# EAGLE board bottomtesting v44 (EAGLE 9.7.0), part 1 of 2
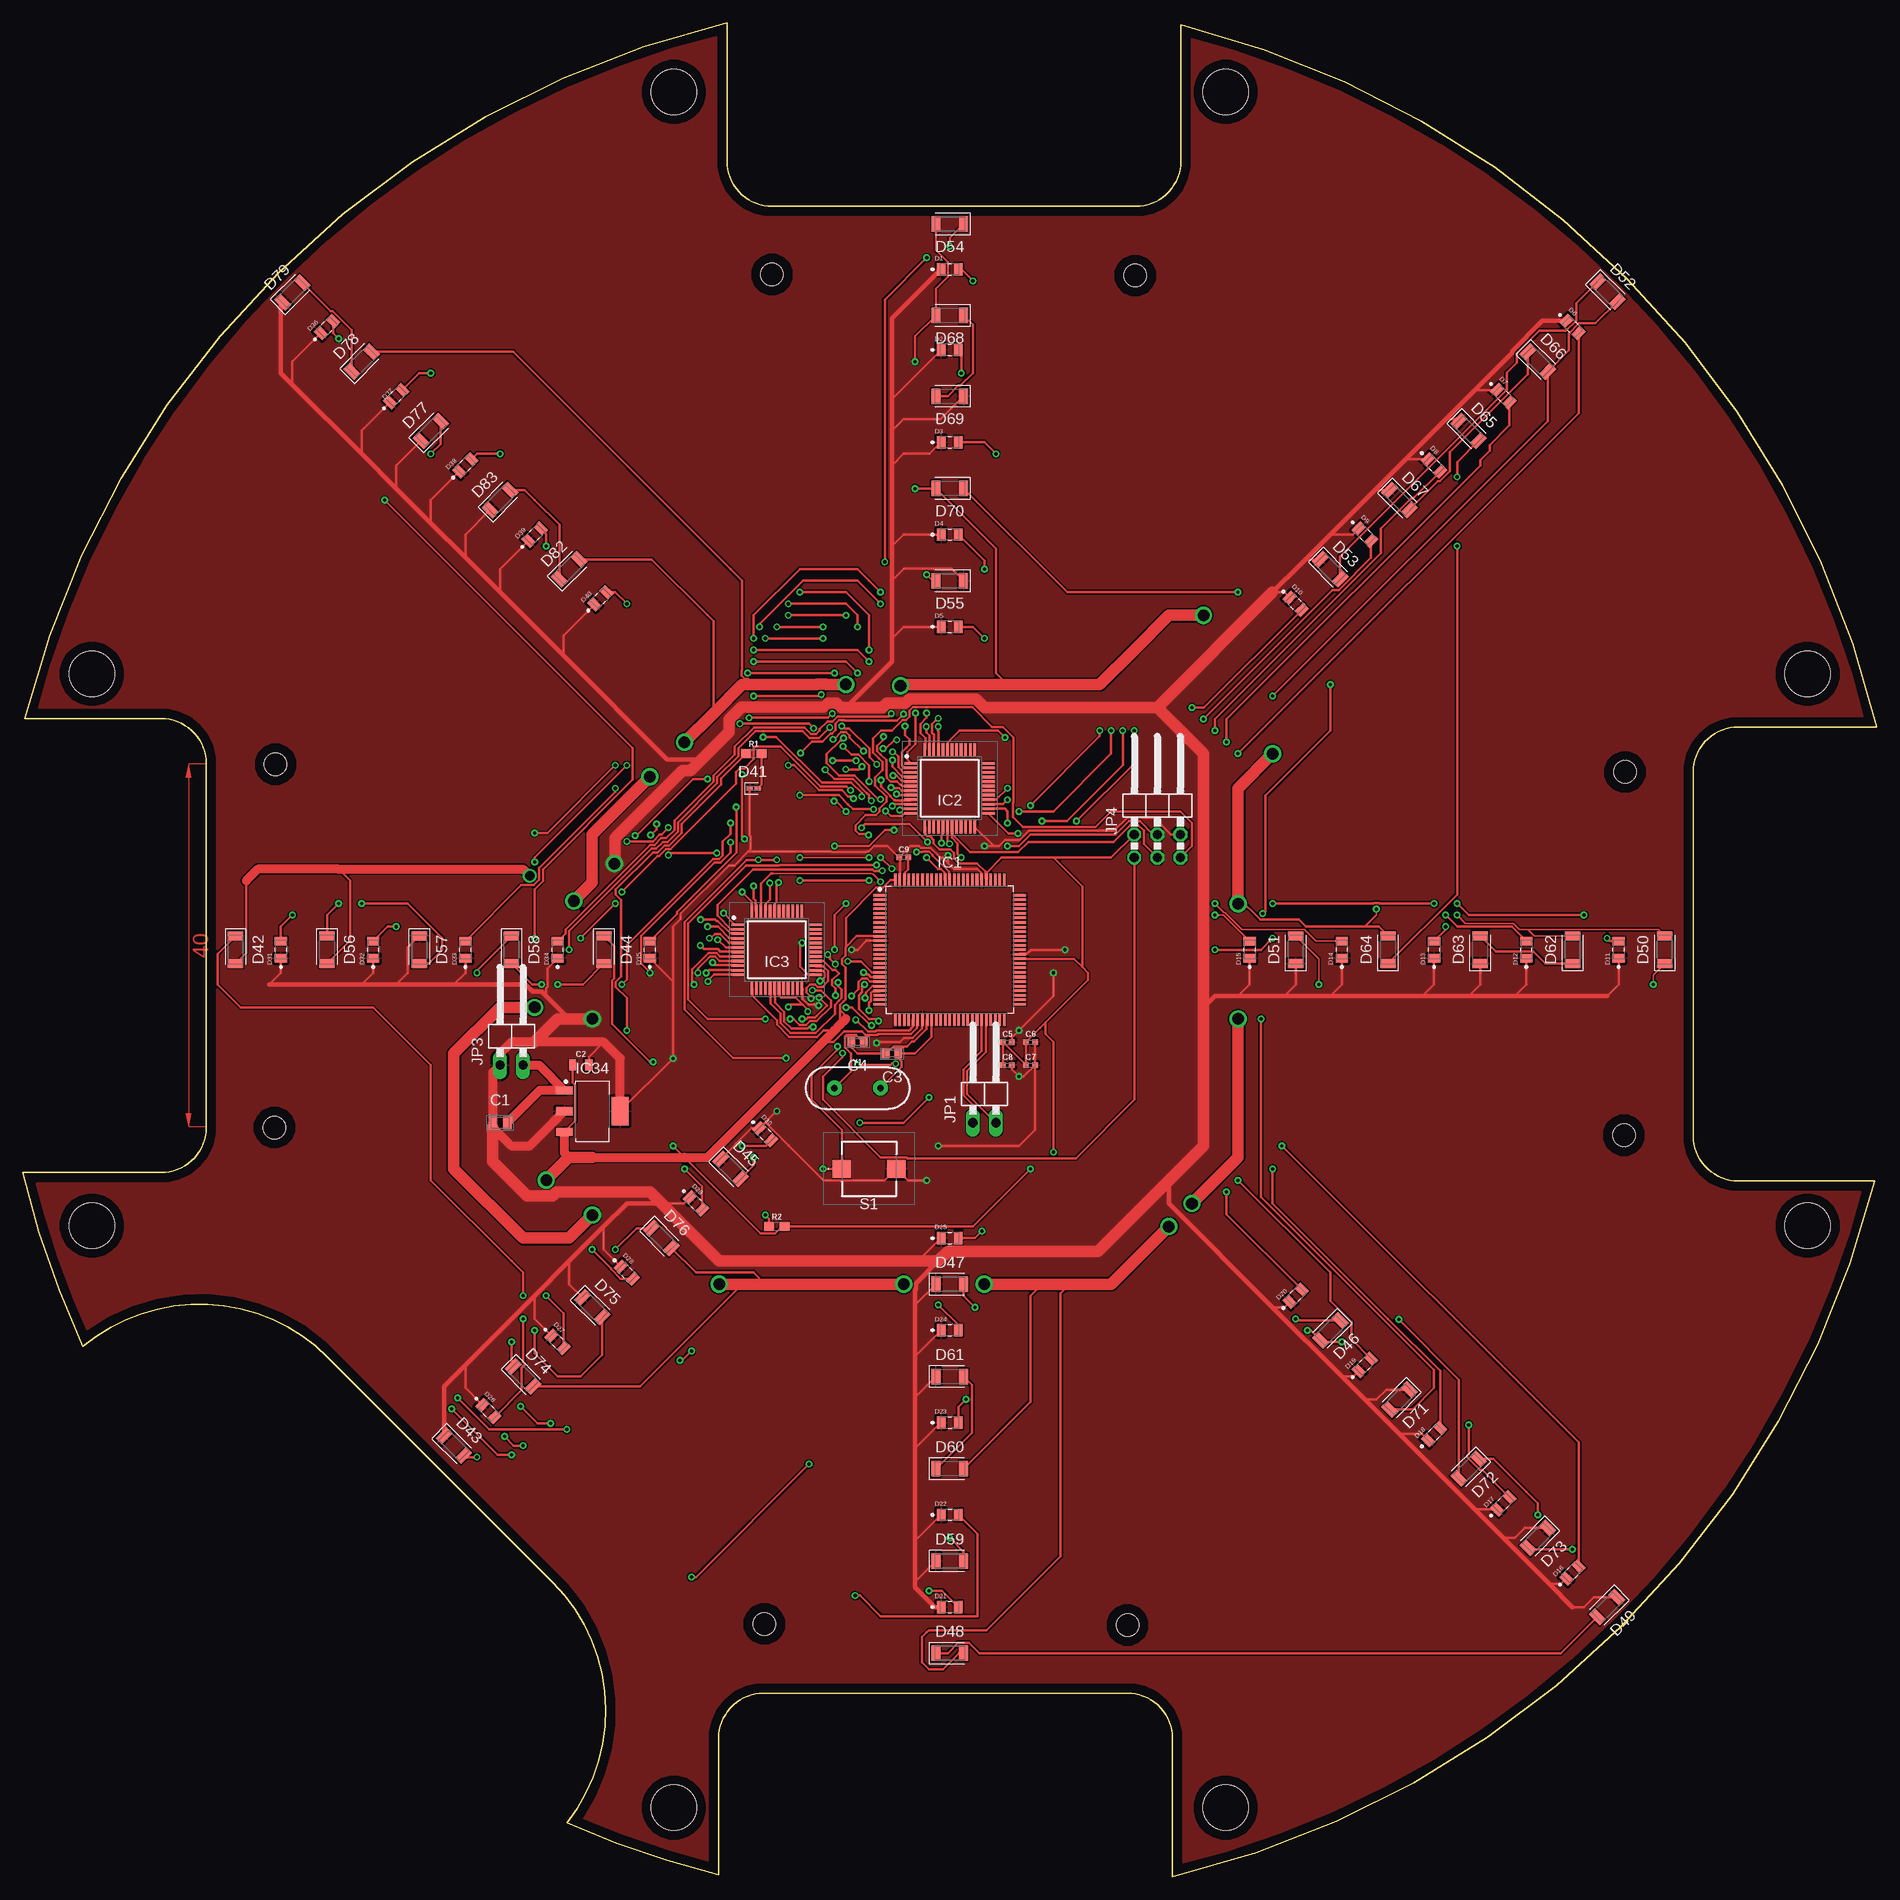
[diagram p0: board, top side]
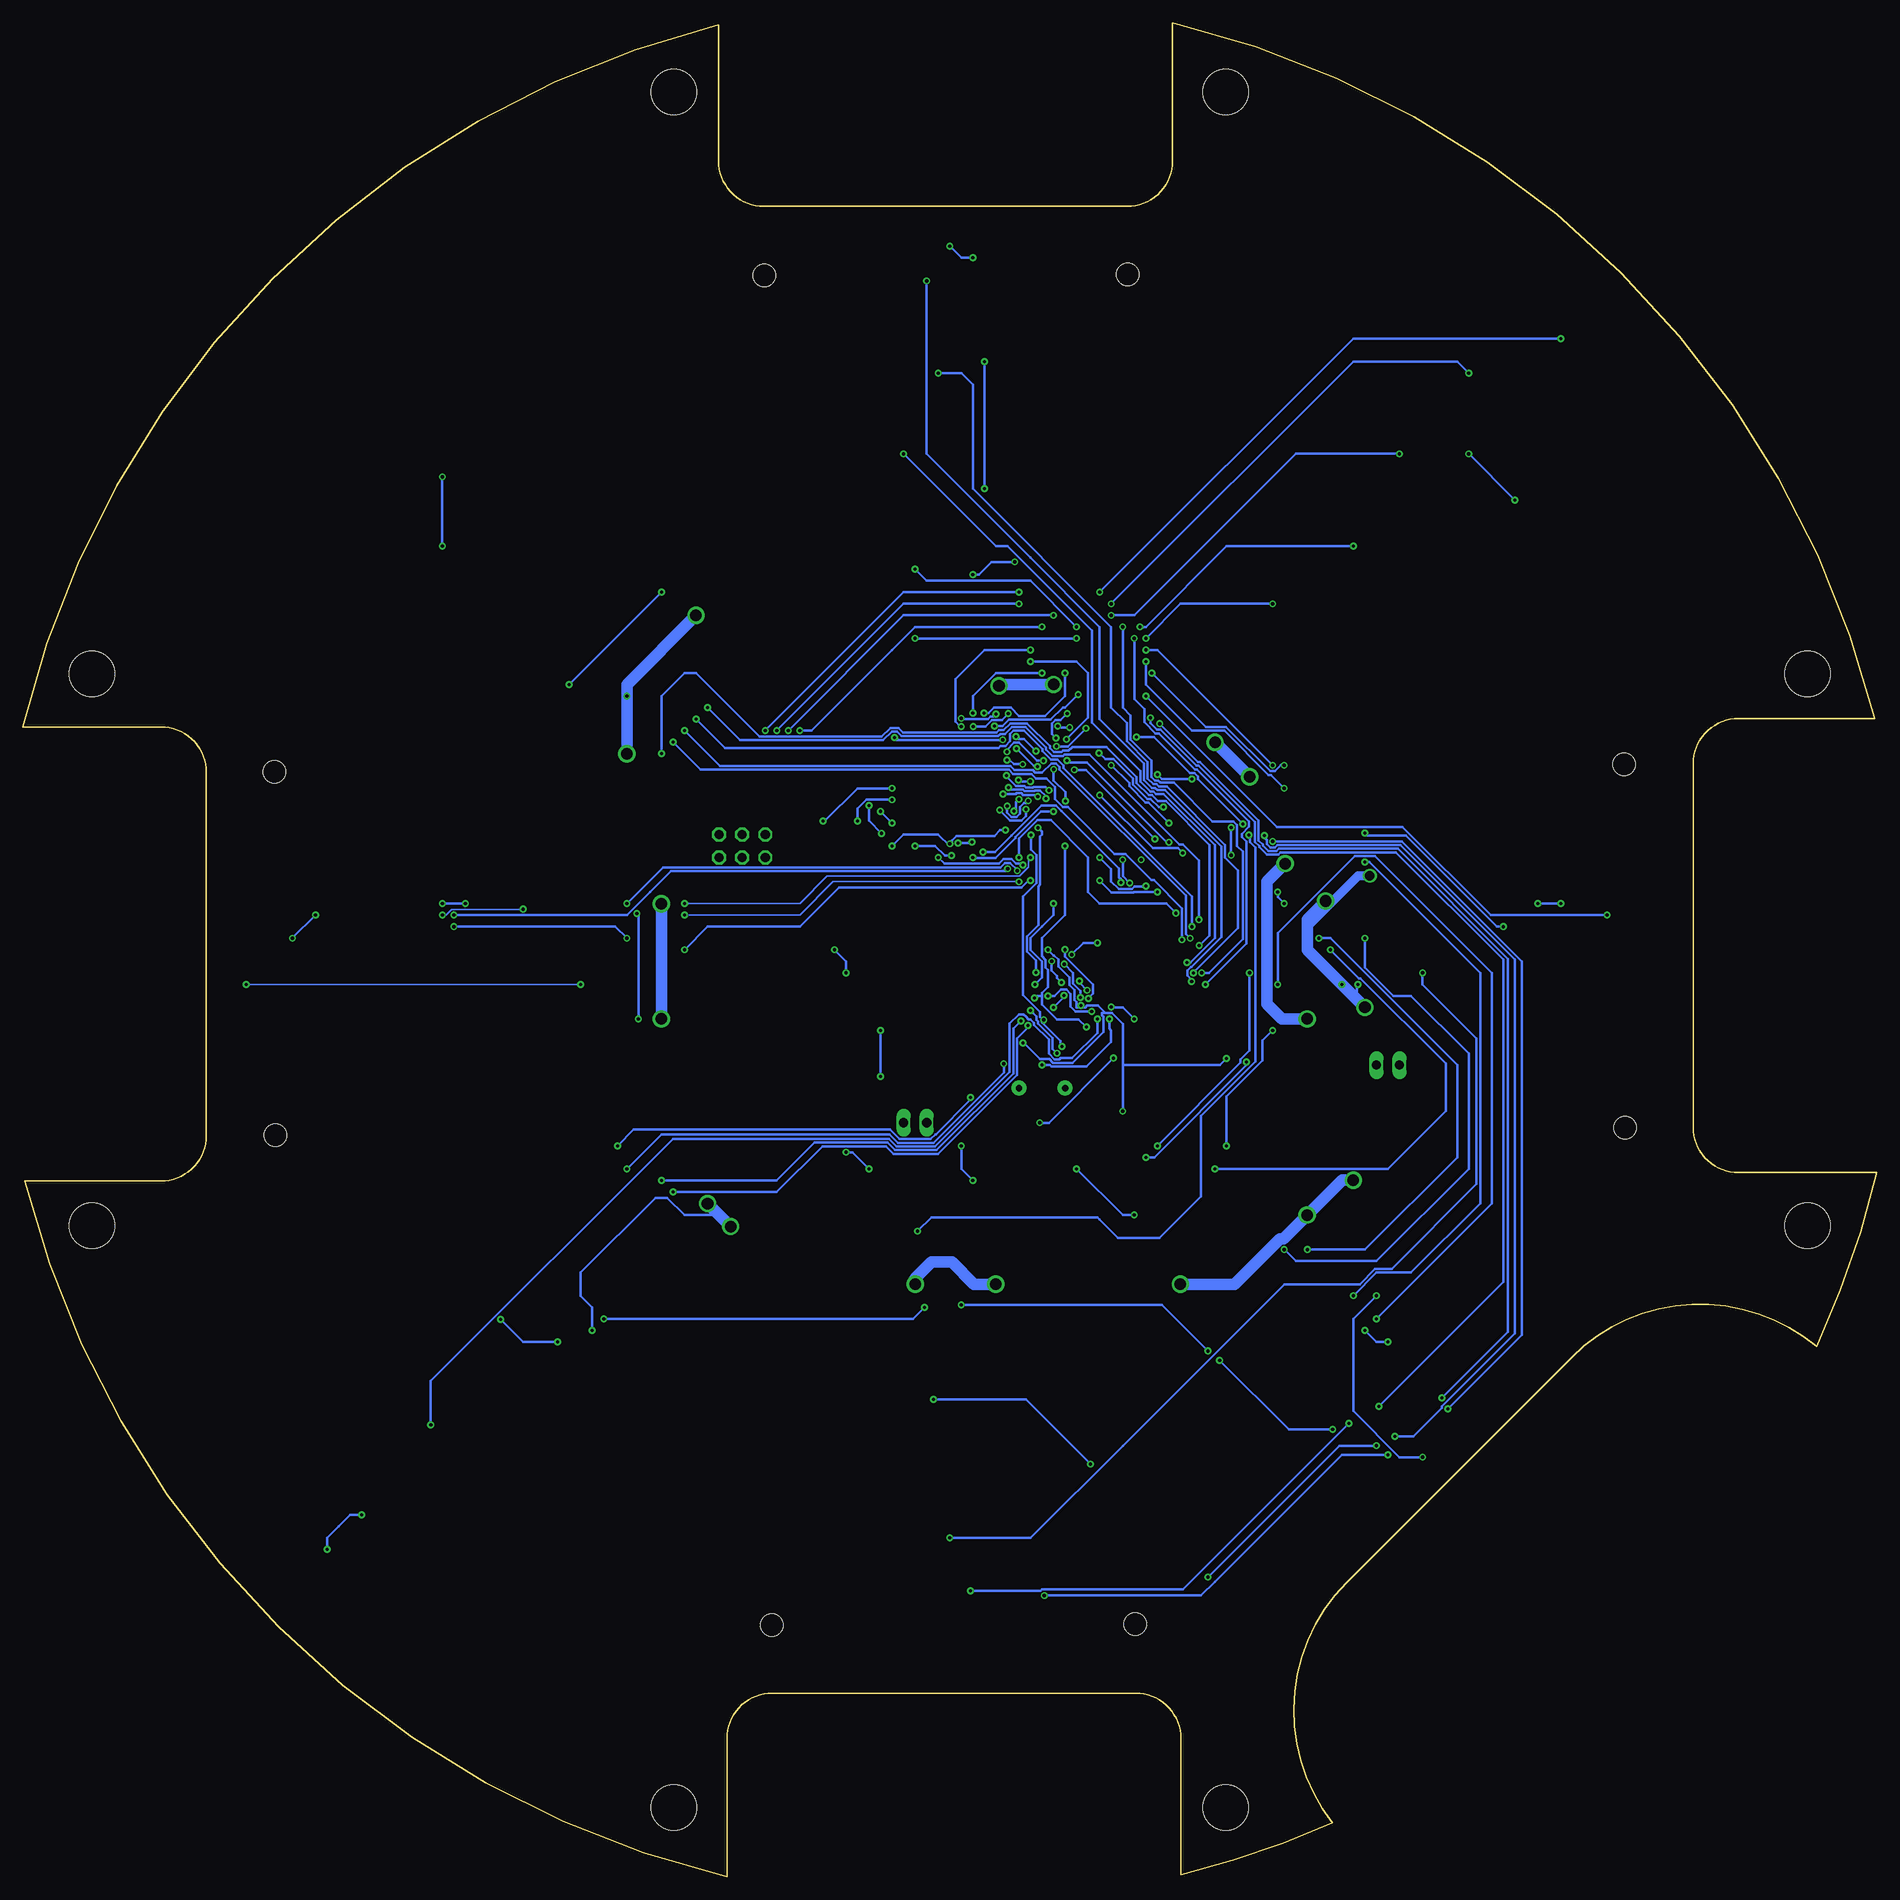
[diagram p1: board, bottom side, seen from below]

Size 204.19 x 204.19 mm. Coordinates in mm from the lower left corner, seen from the top.
Outline: 76.63,0.23 76.63,15.23 arc-90 81.63,20.23 121.63,20.23 arc-90 126.63,15.23 126.63,0 arc62 203.96,76.63 188.96,76.63 arc-90 183.96,81.63 183.96,121.63 arc-90 188.96,126.63 204.19,126.63 arc62 127.56,203.96 127.56,188.96 arc-90 122.56,183.96 82.56,183.96 arc-90 77.56,188.96 77.56,204.19 arc62 0.23,127.56 15.23,127.56 arc-90 20.23,122.56 20.23,82.56 arc-90 15.23,77.56 0,77.56 arc11 6.62,58.39 arc-85 33.61,57.2 58.36,32.45 arc-83 59.93,5.93 arc10 76.63,0.23
Copper layers (1*16): Top / Bottom
Stack-up Default Layer Stack: Top User Defined 0.035mm / Dielectric-1 User Defined 1.5mm / Bottom User Defined 0.035mm
Design rules: minimum copper width 6mil, minimum drill size 0.35mm, copper clearance wire_polygon to wire_polygon 6mil, copper clearance wire_polygon to pad_smd 6mil, copper clearance wire_polygon to via 6mil, copper clearance pad_smd to pad_smd 6mil, copper clearance pad_smd to via 6mil, copper clearance via to via 6mil, copper clearance smd to pad (same net) 6mil, copper clearance smd to via (same net) 6mil, copper clearance smd to smd (same net) 6mil, dimension clearance 40mil, restrict clearance 0mil, drill distance 6mil, keepout clearance 0mil
Holes 2.5 mm at 176.35,81.67 27.73,82.52 122.51,176.35 121.67,27.73 176.46,121.67 27.84,122.51 82.52,176.46 81.67,27.84
Holes 5 mm at 7.61,71.71 71.71,7.61 7.61,132.47 71.71,196.57 196.57,71.71 132.47,7.61 196.57,132.47 132.47,196.57

## Footprints (pad centres in the part's own frame; a part is rotated, then mirrored left to right if it is on the bottom)
CAPC2012X135N = smd 0.95 x 1.39: 1 -0.8,0; 2 0.8,0
0805 = smd 0.8 x 1.2: 1 -0.9,0; 2 0.9,0
CAPC1608X94N = smd 0.83 x 0.96: 1 -0.68,0; 2 0.68,0
0402-TIGHT = smd 0.6 x 0.6: 1 -0.5,0; 2 0.5,0
DIOC2012X80N = smd 0.91 x 1.36: A 0.95,0; K -0.95,0
LEDC1005X25N_FLAT-G = smd 0.7 x 0.5: A 0.45,0; C -0.45,0
LEDC3216X110N_R = smd 0.962 x 1.712: 1 -1.525,0; 2 1.525,0
QFP50P1600X1600X160-100N = smd 1.469 x 0.28: 1 -7.671,6; 2 -7.671,5.5; 3 -7.671,5; 4 -7.671,4.5; 5 -7.671,4; 6 -7.671,3.5; 7 -7.671,3; 8 -7.671,2.5; 9 -7.671,2; 10 -7.671,1.5; 11 -7.671,1; 12 -7.671,0.5; 13 -7.671,0; 14 -7.671,-0.5; 15 -7.671,-1; 16 -7.671,-1.5; 17 -7.671,-2; 18 -7.671,-2.5; 19 -7.671,-3; 20 -7.671,-3.5; 21 -7.671,-4; 22 -7.671,-4.5; 23 -7.671,-5; 24 -7.671,-5.5; 25 -7.671,-6; 51 7.671,-6; 52 7.671,-5.5; 53 7.671,-5; 54 7.671,-4.5; 55 7.671,-4; 56 7.671,-3.5; 57 7.671,-3; 58 7.671,-2.5; 59 7.671,-2; 60 7.671,-1.5; 61 7.671,-1; 62 7.671,-0.5; 63 7.671,0; 64 7.671,0.5; 65 7.671,1; 66 7.671,1.5; 67 7.671,2; 68 7.671,2.5; 69 7.671,3; 70 7.671,3.5; 71 7.671,4; 72 7.671,4.5; 73 7.671,5; 74 7.671,5.5; 75 7.671,6 | smd 0.28 x 1.469: 26 -6,-7.671; 27 -5.5,-7.671; 28 -5,-7.671; 29 -4.5,-7.671; 30 -4,-7.671; 31 -3.5,-7.671; 32 -3,-7.671; 33 -2.5,-7.671; 34 -2,-7.671; 35 -1.5,-7.671; 36 -1,-7.671; 37 -0.5,-7.671; 38 0,-7.671; 39 0.5,-7.671; 40 1,-7.671; 41 1.5,-7.671; 42 2,-7.671; 43 2.5,-7.671; 44 3,-7.671; 45 3.5,-7.671; 46 4,-7.671; 47 4.5,-7.671; 48 5,-7.671; 49 5.5,-7.671; 50 6,-7.671; 76 6,7.671; 77 5.5,7.671; 78 5,7.671; 79 4.5,7.671; 80 4,7.671; 81 3.5,7.671; 82 3,7.671; 83 2.5,7.671; 84 2,7.671; 85 1.5,7.671; 86 1,7.671; 87 0.5,7.671; 88 0,7.671; 89 -0.5,7.671; 90 -1,7.671; 91 -1.5,7.671; 92 -2,7.671; 93 -2.5,7.671; 94 -3,7.671; 95 -3.5,7.671; 96 -4,7.671; 97 -4.5,7.671; 98 -5,7.671; 99 -5.5,7.671; 100 -6,7.671
QFP50P900X900X120-48N = smd 1.475 x 0.3: 1 -4.238,2.75; 2 -4.238,2.25; 3 -4.238,1.75; 4 -4.238,1.25; 5 -4.238,0.75; 6 -4.238,0.25; 7 -4.238,-0.25; 8 -4.238,-0.75; 9 -4.238,-1.25; 10 -4.238,-1.75; 11 -4.238,-2.25; 12 -4.238,-2.75; 25 4.238,-2.75; 26 4.238,-2.25; 27 4.238,-1.75; 28 4.238,-1.25; 29 4.238,-0.75; 30 4.238,-0.25; 31 4.238,0.25; 32 4.238,0.75; 33 4.238,1.25; 34 4.238,1.75; 35 4.238,2.25; 36 4.238,2.75 | smd 0.3 x 1.475: 13 -2.75,-4.238; 14 -2.25,-4.238; 15 -1.75,-4.238; 16 -1.25,-4.238; 17 -0.75,-4.238; 18 -0.25,-4.238; 19 0.25,-4.238; 20 0.75,-4.238; 21 1.25,-4.238; 22 1.75,-4.238; 23 2.25,-4.238; 24 2.75,-4.238; 37 2.75,4.238; 38 2.25,4.238; 39 1.75,4.238; 40 1.25,4.238; 41 0.75,4.238; 42 0.25,4.238; 43 -0.25,4.238; 44 -0.75,4.238; 45 -1.25,4.238; 46 -1.75,4.238; 47 -2.25,4.238; 48 -2.75,4.238
SOT230P700X170-4 = smd 1.86 x 0.898: 1 -3.075,2.3; 2 -3.075,0; 3 -3.075,-2.3 | smd 1.86 x 3.189: 4 3.075,0
1X02/90 = drill 1.016 long: 1 -1.27,-3.81; 2 1.27,-3.81
2X03/90 = drill 1.016 octagon: 1 -2.54,-6.35; 2 -2.54,-3.81; 3 0,-6.35; 4 0,-3.81; 5 2.54,-6.35; 6 2.54,-3.81
0603 = smd 1.1 x 1: 1 -0.85,0; 2 0.85,0
EVPBDCC1A000 = smd 2 x 2: A1 -3,0; B1 3,0
HC49US = drill 0.7 pad 1.651: 1 -2.54,0; 2 2.54,0

## Placement (x,y rotation side)
C1  CM21X5R107M06AT  [CAPC2012X135N]  52.56,83.04 0 top
C2  10uF  [0805]  61.45,89.39 0 top
C3  VJ0603D220FXPAJ  [CAPC1608X94N]  95.74,90.66 0 top
C4  VJ0603D220FXPAJ  [CAPC1608X94N]  91.93,91.93 0 top
C5  0.1uF  [0402-TIGHT]  108.44,91.93 0 top
C6  0.1uF  [0402-TIGHT]  110.98,91.93 0 top
C7  0.1uF  [0402-TIGHT]  110.98,89.39 0 top
C8  0.1uF  [0402-TIGHT]  108.44,89.39 0 top
C9  0.1uF  [0402-TIGHT]  97.01,112.25 0 top
D1  019-141-411-R  [DIOC2012X80N]  102.09,177.02 0 top
D2  019-141-411-R  [DIOC2012X80N]  102.09,168.13 0 top
D3  019-141-411-R  [DIOC2012X80N]  102.09,157.97 0 top
D4  019-141-411-R  [DIOC2012X80N]  102.09,147.81 0 top
D5  019-141-411-R  [DIOC2012X80N]  102.09,137.65 0 top
D6  019-141-411-R  [DIOC2012X80N]  170.67,170.67 315 top
D7  019-141-411-R  [DIOC2012X80N]  163.05,163.05 315 top
D8  019-141-411-R  [DIOC2012X80N]  155.43,155.43 315 top
D9  019-141-411-R  [DIOC2012X80N]  147.81,147.81 315 top
D10  019-141-411-R  [DIOC2012X80N]  140.19,140.19 315 top
D11  019-141-411-R  [DIOC2012X80N]  175.75,102.09 90 top
D12  019-141-411-R  [DIOC2012X80N]  165.59,102.09 90 top
D13  019-141-411-R  [DIOC2012X80N]  155.43,102.09 90 top
D14  019-141-411-R  [DIOC2012X80N]  145.27,102.09 90 top
D15  019-141-411-R  [DIOC2012X80N]  135.11,102.09 90 top
D16  019-141-411-R  [DIOC2012X80N]  170.67,33.51 45 top
D17  019-141-411-R  [DIOC2012X80N]  163.05,41.13 45 top
D18  019-141-411-R  [DIOC2012X80N]  155.43,48.75 45 top
D19  019-141-411-R  [DIOC2012X80N]  147.81,56.37 45 top
D20  019-141-411-R  [DIOC2012X80N]  140.19,63.99 45 top
D21  019-141-411-R  [DIOC2012X80N]  102.09,29.7 0 top
D22  019-141-411-R  [DIOC2012X80N]  102.09,39.86 0 top
D23  019-141-411-R  [DIOC2012X80N]  102.09,50.02 0 top
D24  019-141-411-R  [DIOC2012X80N]  102.09,60.18 0 top
D25  019-141-411-R  [DIOC2012X80N]  102.09,70.34 0 top
D26  019-141-411-R  [DIOC2012X80N]  51.29,51.29 315 top
D27  019-141-411-R  [DIOC2012X80N]  58.91,58.91 315 top
D28  019-141-411-R  [DIOC2012X80N]  66.53,66.53 315 top
D29  019-141-411-R  [DIOC2012X80N]  74.15,74.15 315 top
D30  019-141-411-R  [DIOC2012X80N]  81.77,81.77 315 top
D31  019-141-411-R  [DIOC2012X80N]  28.43,102.09 90 top
D32  019-141-411-R  [DIOC2012X80N]  38.59,102.09 90 top
D33  019-141-411-R  [DIOC2012X80N]  48.75,102.09 90 top
D34  019-141-411-R  [DIOC2012X80N]  58.91,102.09 90 top
D35  019-141-411-R  [DIOC2012X80N]  69.07,102.09 90 top
D36  019-141-411-R  [DIOC2012X80N]  33.51,170.67 45 top
D37  019-141-411-R  [DIOC2012X80N]  41.13,163.05 45 top
D38  019-141-411-R  [DIOC2012X80N]  48.75,155.43 45 top
D39  019-141-411-R  [DIOC2012X80N]  56.37,147.81 45 top
D40  019-141-411-R  [DIOC2012X80N]  63.63,140.79 45 top
D41  LED_GREEN  [LEDC1005X25N_FLAT-G]  80.5,119.87 0 top
D42  LED_RED  [LEDC3216X110N_R]  23.45,102.09 270 top
D43  LED_RED  [LEDC3216X110N_R]  47.48,47.48 315 top
D44  LED_RED  [LEDC3216X110N_R]  63.99,102.09 270 top
D45  LED_RED  [LEDC3216X110N_R]  77.96,77.96 315 top
D46  LED_RED  [LEDC3216X110N_R]  144,60.18 225 top
D47  LED_RED  [LEDC3216X110N_R]  102.09,65.26 0 top
D48  LED_RED  [LEDC3216X110N_R]  102.09,24.62 0 top
D49  LED_RED  [LEDC3216X110N_R]  174.48,29.7 225 top
D50  LED_RED  [LEDC3216X110N_R]  180.83,102.09 90 top
D51  LED_RED  [LEDC3216X110N_R]  140.19,102.09 90 top
D52  LED_RED  [LEDC3216X110N_R]  174.53,174.57 315 top
D53  LED_RED  [LEDC3216X110N_R]  144,144 315 top
D54  LED_RED  [LEDC3216X110N_R]  102.09,182.01 180 top
D55  LED_RED  [LEDC3216X110N_R]  102.09,142.73 180 top
D56  LED_RED  [LEDC3216X110N_R]  33.51,102.09 270 top
D57  LED_RED  [LEDC3216X110N_R]  43.67,102.09 270 top
D58  LED_RED  [LEDC3216X110N_R]  53.83,102.09 270 top
D59  LED_RED  [LEDC3216X110N_R]  102.09,34.78 0 top
D60  LED_RED  [LEDC3216X110N_R]  102.09,44.94 0 top
D61  LED_RED  [LEDC3216X110N_R]  102.09,55.1 0 top
D62  LED_RED  [LEDC3216X110N_R]  170.67,102.09 90 top
D63  LED_RED  [LEDC3216X110N_R]  160.51,102.09 90 top
D64  LED_RED  [LEDC3216X110N_R]  150.35,102.09 90 top
D65  LED_RED  [LEDC3216X110N_R]  159.24,159.24 315 top
D66  LED_RED  [LEDC3216X110N_R]  166.86,166.86 315 top
D67  LED_RED  [LEDC3216X110N_R]  151.62,151.62 315 top
D68  LED_RED  [LEDC3216X110N_R]  102.09,171.94 180 top
D69  LED_RED  [LEDC3216X110N_R]  102.09,163.05 180 top
D70  LED_RED  [LEDC3216X110N_R]  102.09,152.89 180 top
D71  LED_RED  [LEDC3216X110N_R]  151.62,52.56 225 top
D72  LED_RED  [LEDC3216X110N_R]  159.24,44.94 225 top
D73  LED_RED  [LEDC3216X110N_R]  166.86,37.32 225 top
D74  LED_RED  [LEDC3216X110N_R]  55.1,55.1 315 top
D75  LED_RED  [LEDC3216X110N_R]  62.72,62.72 315 top
D76  LED_RED  [LEDC3216X110N_R]  70.34,70.34 315 top
D77  LED_RED  [LEDC3216X110N_R]  44.94,159.24 45 top
D78  LED_RED  [LEDC3216X110N_R]  37.32,166.86 45 top
D79  LED_RED  [LEDC3216X110N_R]  29.7,174.48 45 top
D82  LED_RED  [LEDC3216X110N_R]  60.18,144 45 top
D83  LED_RED  [LEDC3216X110N_R]  52.56,151.62 45 top
IC1  ATMEGA2560  [QFP50P1600X1600X160-100N]  102.09,102.09 0 top
IC2  ADG731BSUZ  [QFP50P900X900X120-48N]  102.09,119.87 0 top
IC3  ADG731BSUZ  [QFP50P900X900X120-48N]  83.04,102.09 0 top
IC34  LM7805_SOT223  [SOT230P700X170-4]  62.72,84.31 0 top
JP1  PINHD-1X2/90  [1X02/90]  105.9,86.85 0 top
JP3  PINHD-1X2/90  [1X02/90]  53.83,93.2 0 top
JP4  PINHD-2X3/90  [2X03/90]  124.95,118.6 0 top
R1  1k  [0603]  80.5,123.68 0 top
R2  10k  [0603]  83.04,71.61 0 top
S1  EVP-BDCC1A000  [EVPBDCC1A000]  93.2,77.96 0 top
Y1  16MHz  [HC49US]  91.93,86.85 0 top

## Library data of the parts
C1 = CM21X5R107M06AT; DESCRIPTION: Multilayer Ceramic Capacitors MLCC - SMD/SMT 6.3V 100uF X5R 0805 20% 3Term; HEIGHT: 1.35mm; MANUFACTURER_NAME: KYOCERA; MANUFACTURER_PART_NUMBER: CM21X5R107M06AT; MOUSER_PART_NUMBER: 581-CM21X5R107M06AT; MOUSER_PRICE-STOCK: https://www.mouser.co.uk/ProductDetail/KYOCERA-AVX/CM21X5R107M06AT?qs=Znm5pLBrcAI44q2aWOSJYQ%3D%3D
C2 = SparkFun-Capacitors; PROD_ID: CAP-14259
C3 C4 = VJ0603D220FXPAJ; DESCRIPTION: Multilayer Ceramic Capacitors MLCC - SMD/SMT 0603 22pF 250V C0G 1% HI FREQ; HEIGHT: 0.94mm; MANUFACTURER_NAME: Vishay; MANUFACTURER_PART_NUMBER: VJ0603D220FXPAJ; MOUSER_PART_NUMBER: 77-VJ0603D220FXPAJ; MOUSER_PRICE-STOCK: https://www.mouser.co.uk/ProductDetail/Vishay-Vitramon/VJ0603D220FXPAJ?qs=iYZfuFMDqcb%2FcnkyiAmShQ%3D%3D
C5-C9 = SparkFun-Capacitors; PROD_ID: CAP-12416
D1-D40 = 019-141-411-R; MANUFACTURER: Advanced Photonix; MAXIMUM_PACKAGE_HEIGHT: 0.8mm; PARTREV: Rev 5/7/2019; STANDARD: IPC 7351B
D41 = LED; CATEGORY: LED; COLOR: GREEN; DESCRIPTION: CHIP LED FLAT; SUB-CATEGORY: CHIP; TYPE: FLAT_TOP
D42-D79 D82 D83 = Opto-Electronic; CATEGORY: Opto-Electronic; COLOR: Red; SUB-CATEGORY: LED
IC1 = IC_Embedded; CATEGORY: IC_Embedded; DESCRIPTION: IC MCU 8BIT 256KB FLASH 100TQFP; MANUFACTURER: Microchip Technology; MPN: ATMEGA2560-16AUR; OPERATING_TEMP: -40°C to 85°C; PART_STATUS: Active; SERIES: AVR® ATmega; SPEED: 16MHz; SUB-CATEGORY: Microcontroller
IC2 IC3 = ADG731BSUZ; DESCRIPTION: ADG731BSUZ, Multiplexer Single 32:1, 3, 5V, 48-Pin, TQFP; HEIGHT: 1.2mm; MANUFACTURER_NAME: Analog Devices; MANUFACTURER_PART_NUMBER: ADG731BSUZ; MOUSER_PART_NUMBER: 584-ADG731BSUZ; MOUSER_PRICE-STOCK: https://www.mouser.co.uk/ProductDetail/Analog-Devices/ADG731BSUZ?qs=BpaRKvA4VqEJueulxDCy6w%3D%3D
IC34 = IC_Power-Management; CATEGORY: IC_Logic; DESCRIPTION: 5V Voltage Regulator; MANUFACTURER: Generic; MPN: Generic; SERIES: LM7805; SUB-CATEGORY: Voltage Regulator; TYPE: 5V
JP1 JP3 = Connector; CATEGORY: CONNECTOR; SUB-CATEGORY: PIN-HEADER
JP4 = Connector; CATEGORY: Headers; DESCRIPTION: Header, Right Angle, 2x3 Position; MANUFACTURER: Generic; MPN: Generic; OPERATING_TEMPERATURE: Generic; PART_STATUS: Active; PITCH: 0.100" (2.54mm); ROHS_COMPLIANCE: Generic; SERIES: Generic; SUB-CATEGORY: Headers, Male Pins; TYPE: Board to Board or Cable, Unshrouded, Through Hole, Right Angle
R1 = SparkFun-Resistors; PROD_ID: RES-07856
R2 = SparkFun-Resistors; PROD_ID: RES-00824
S1 = EVP-BDCC1A000; DESCRIPTION: Tactile Switches 6mm x 6mm SMD Op Force 4.0N; HEIGHT: 4.2mm; MANUFACTURER_NAME: Panasonic; MANUFACTURER_PART_NUMBER: EVP-BDCC1A000; MOUSER_PART_NUMBER: 667-EVP-BDCC1A000; MOUSER_PRICE-STOCK: https://www.mouser.co.uk/ProductDetail/Panasonic/EVP-BDCC1A000?qs=4qgZ1GHix0Ui2FekNThUWQ%3D%3D
Y1 = SparkFun-Clocks; PROD_ID: XTAL-08181; SF_ID: COM-00536

## Nets
+5V: C2.1 C5.1 C6.1 C7.1 C8.1 D42.2 D44.2 D46.2 D48.2 D50.2 D52.2 D54.2 D56.2 D58.2 D60.2 D62.2 D64.2 D66.2 D68.2 D70.2 D72.2 D74.2 D76.2 D78.2 D82.2 IC1.10 IC1.31 IC1.61 IC1.80 IC1.100 IC2.13 IC3.13 IC34.3 JP4.2 R1.1 R2.2
AREF: C9.2 IC1.98
GND: C1.1 C2.2 C5.2 C6.2 C7.2 C8.2 C9.1 D1.K D2.K D3.K D4.K D5.K D6.K D7.K D8.K D9.K D10.K D11.K D12.K D13.K D14.K D15.K D16.K D17.K D18.K D19.K D20.K D21.K D22.K D23.K D24.K D25.K D26.K D27.K D28.K D29.K D30.K D31.K D32.K D33.K D34.K D35.K D36.K D37.K D38.K D39.K D40.K D41.C D43.1 D45.1 D47.1 D49.1 D51.1 D53.1 D55.1 D57.1 D59.1 D61.1 D63.1 D65.1 D67.1 D69.1 D71.1 D73.1 D75.1 D77.1 D79.1 D83.1 IC1.11 IC1.32 IC1.62 IC1.81 IC1.99 IC2.24 IC3.24 IC34.2 IC34.4 JP3.1 JP4.6 S1.B1
IC2_GND: IC2.23
IC2_NC_1: IC2.15
IC2_NC_2: IC2.16
IC2_NC_3: IC2.20
IC2_NC_4: IC2.21
IC2_NC_5: IC2.22
IC2_NC_6: IC2.41
IC2_NC_7: IC2.42
IC2_NC_8: IC2.44
IC2_S1: D21.A IC2.12
IC2_S2: D22.A IC2.11
IC2_S3: D23.A IC2.10
IC2_S4: D24.A IC2.9
IC2_S5: D25.A IC2.8
IC2_S6: D26.A IC2.7
IC2_S7: D27.A IC2.6
IC2_S8: D28.A IC2.5
IC2_S9: D29.A IC2.4
IC2_S10: D30.A IC2.3
IC2_S11: D31.A IC2.2
IC2_S12: D32.A IC2.1
IC2_S13: D33.A IC2.48
IC2_S14: D34.A IC2.47
IC2_S15: D35.A IC2.46
IC2_S16: D36.A IC2.45
IC2_S17: D37.A IC2.25
IC2_S18: D38.A IC2.26
IC2_S19: D39.A IC2.27
IC2_S20: D40.A IC2.28
IC2_S21: IC2.29
IC2_S22: IC2.30
IC2_S23: IC2.31
IC2_S24: IC2.32
IC2_S25: IC2.33
IC2_S26: IC2.34
IC2_S27: IC2.35
IC2_S28: IC2.36
IC2_S29: IC2.37
IC2_S30: IC2.38
IC2_S31: IC2.39
IC2_S32: IC2.40
IC2_VDD_2: IC2.14
IC3_GND: IC3.23
IC3_NC_1: IC3.15
IC3_NC_2: IC3.16
IC3_NC_3: IC3.20
IC3_NC_4: IC3.21
IC3_NC_5: IC3.22
IC3_NC_6: IC3.41
IC3_NC_7: IC3.42
IC3_NC_8: IC3.44
IC3_S1: D1.A IC3.12
IC3_S2: D2.A IC3.11
IC3_S3: D3.A IC3.10
IC3_S4: D4.A IC3.9
IC3_S5: D5.A IC3.8
IC3_S6: D6.A IC3.7
IC3_S7: D7.A IC3.6
IC3_S8: D8.A IC3.5
IC3_S9: D9.A IC3.4
IC3_S10: D10.A IC3.3
IC3_S11: D11.A IC3.2
IC3_S12: D12.A IC3.1
IC3_S13: D13.A IC3.48
IC3_S14: D14.A IC3.47
IC3_S15: D15.A IC3.46
IC3_S16: D16.A IC3.45
IC3_S17: D17.A IC3.25
IC3_S18: D18.A IC3.26
IC3_S19: D19.A IC3.27
IC3_S20: D20.A IC3.28
IC3_S21: IC3.29
IC3_S22: IC3.30
IC3_S23: IC3.31
IC3_S24: IC3.32
IC3_S25: IC3.33
IC3_S26: IC3.34
IC3_S27: IC3.35
IC3_S28: IC3.36
IC3_S29: IC3.37
IC3_S30: IC3.38
IC3_S31: IC3.39
IC3_S32: IC3.40
IC3_VDD_2: IC3.14
N$1: D42.1 D43.2
N$3: D44.1 D45.2
N$6: D46.1 D47.2
N$9: D48.1 D49.2
N$12: D50.1 D51.2
N$15: D52.1 D53.2
N$18: D54.1 D55.2
N$21: D56.1 D57.2
N$24: D58.1 D59.2
N$27: D60.1 D61.2
N$30: D62.1 D63.2
N$33: D41.A R1.2
N$34: D64.1 D65.2
N$37: D66.1 D67.2
N$38: C4.2 Y1.1
N$41: D68.1 D69.2
N$44: D70.1 D71.2
N$47: D72.1 D73.2
N$50: D74.1 D75.2
N$53: D76.1 D77.2
N$56: D78.1 D79.2
N$62: D82.1 D83.2
PA0: IC1.78
PA1: IC1.77
PA2: IC1.76
PA3: IC1.75
PA4: IC1.74
PA5: IC1.73
PA6: IC1.72
PA7: IC1.71
PB0: IC1.19 IC2.17
PB1: IC1.20 IC2.19 IC3.19 JP4.3
PB2: IC1.21 IC2.18 IC3.18 JP4.4
PB3: IC1.22 JP4.1
PB4: IC1.23
PB5: IC1.24
PB6: IC1.25
PB7: IC1.26
PC0: IC1.53
PC1: IC1.54
PC2: IC1.55
PC3: IC1.56
PC4: IC1.57
PC5: IC1.58
PC6: IC1.59
PC7: IC1.60
PD0: IC1.43
PD1: IC1.44
PD2: IC1.45 JP1.1
PD3: IC1.46 JP1.2
PD4: IC1.47
PD5: IC1.48
PD6: IC1.49
PD7: IC1.50
PE0: IC1.2
PE1: IC1.3
PE2: IC1.4
PE3: IC1.5
PE4: IC1.6
PE5: IC1.7
PE6: IC1.8
PE7: IC1.9
PF0: IC1.97
PF1: IC1.96
PF2: IC1.95
PF3: IC1.94
PG0: IC1.51
PG1: IC1.52
PG2: IC1.70
PG3: IC1.28
PG4: IC1.29
PG5: IC1.1
PH0: IC1.12
PH1: IC1.13
PH2: IC1.14
PH3: IC1.15
PH4: IC1.16
PH5: IC1.17
PH6: IC1.18 IC3.17
PH7: IC1.27
PJ0: IC1.63
PJ1: IC1.64
PJ2: IC1.65
PJ3: IC1.66
PJ4: IC1.67
PJ5: IC1.68
PJ6: IC1.69
PJ7: IC1.79
PK0: IC1.89 IC2.43
PK1: IC1.88 IC3.43
PK2: IC1.87
PK3: IC1.86
PK4: IC1.85
PK5: IC1.84
PK6: IC1.83
PK7: IC1.82
PL0: IC1.35
PL1: IC1.36
PL2: IC1.37
PL3: IC1.38
PL4: IC1.39
PL5: IC1.40
PL6: IC1.41
PL7: IC1.42
RESET: IC1.30 JP4.5 R2.1 S1.A1
TCK: IC1.93
TDI: IC1.90
TDO: IC1.91
TMS: IC1.92
VCC: C1.2 IC34.1 JP3.2
XTAL1: C3.2 IC1.34 Y1.2
XTAL2: C3.1 C4.1 IC1.33